# Altium PCB djb_v2_flex_rev.PcbDoc
Units mm, origin at the board's own origin, x right, y up, seen from the top; angles counter-clockwise.
Board outline 12.43 x 7.55 mm, 2 copper layers (Top Layer, Bottom Layer), stack 0.093 mm thick; 3 components, 4 nets, 16 pads, 0 vias.
Unrouted connection lines stored in the file: 1.
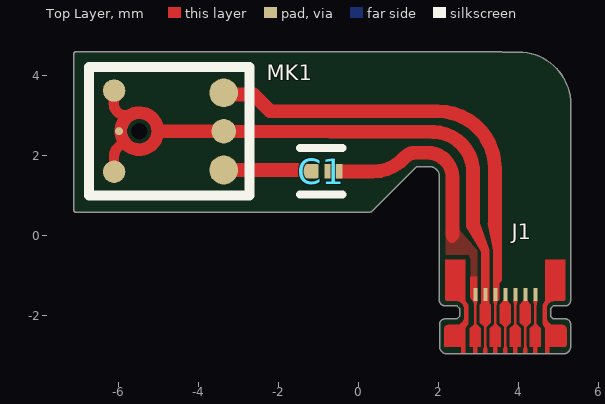
[diagram p0: Top Layer view]
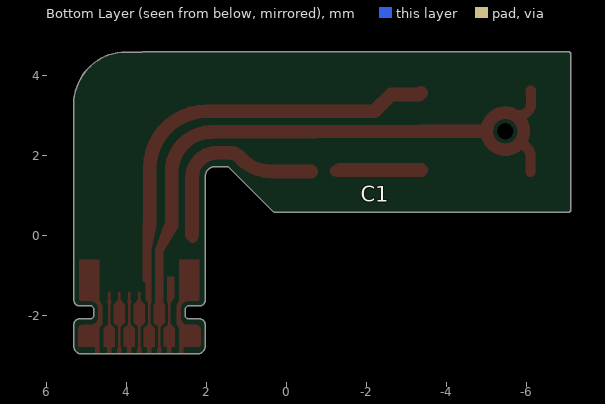
[diagram p1: Bottom Layer view, seen from below]

## Layer stack, top to bottom
Top Coverlay: solder mask 0.0102, Solder Resist, Dk 3.5
Top Coverlay: solder mask 0.012, FC-001, Dk 4
Top Layer: signal copper 0.018
Dielectric 1: dielectric 0.025, FR-4, Dk 4.8
Bottom Layer: signal copper 0.012
Adhesive 1: prepreg 0.013, PP-006, Dk 4.1
Stiffener 1: core 0.025, Core-009, Dk 4.5
Bottom Solder: solder mask 0.012, FC-001, Dk 4
Bottom Solder: solder mask 0.0102, Solder Resist, Dk 3.5

## Board outline
2.037,-2.76 2.037,-2.21 cw(c2.175,-2.21) 2.175,-2.071 2.475,-2.071 2.537,-2.01 2.537,-1.81 2.475,-1.748 2.175,-1.748 cw(c2.175,-1.61) 2.052,-1.674 2.032,-1.64 2.032,1.49 ccw(c1.79,1.49) 1.824,1.729 1.81,1.727 1.451,1.727 0.327,0.603 0.3,0.592 -7.07,0.592 -7.108,0.63 -7.108,4.567 -7.07,4.605 3.59,4.605 3.612,4.598 4.01,4.598 cw(c4.01,3.29) 5.318,3.29 5.318,-0.28 5.313,-0.299 5.313,-1.61 cw(c5.175,-1.61) 5.175,-1.748 4.875,-1.748 4.813,-1.81 4.813,-2.01 4.875,-2.071 5.175,-2.071 cw(c5.175,-2.21) 5.313,-2.21 5.313,-2.76 cw(c5.125,-2.76) 5.125,-2.948 2.225,-2.948 cw(c2.225,-2.76)

## Design rules (kind name [scope] priority, off if disabled: settings)
Clearance Clearance_1 [All] p1: gap=0.01 ignorepadtopadclearanceinfootprint=FALSE except(0: Arc-Hole Track-Hole SMDPad-Hole THPad-Hole Via-Hole Fill-Hole Poly-Hole Region-Hole Text-Hole)
Clearance [All] p2: gap=0.254 ignorepadtopadclearanceinfootprint=FALSE except(0: Arc-Hole Track-Hole SMDPad-Hole THPad-Hole Via-Hole Fill-Hole Poly-Hole Region-Hole Text-Hole)
DiffPairsRouting [All] p1: maxlimit=0.254 minlimit=0.254 mostfreqgap=0.254 substack1={70FC03B5-46E0-49A6-B8D5-33E4079AE70D} toplayer_{70fc03b5-46e0-49a6-b8d5-33e4079ae70d}_minwidth=0.381 toplayer_{70fc03b5-46e0-49a6-b8d5-33e4079ae70d}_maxwidth=0.381 toplayer_{70fc03b5-46e0-49a6-b8d5-33e4079ae70d}_prefwidth=0.381 bottomlayer_{70fc03b5-46e0-49a6-b8d5-33e4079ae70d}_minwidth=0.381 bottomlayer_{70fc03b5-46e0-49a6-b8d5-33e4079ae70d}_maxwidth=0.381 bottomlayer_{70fc03b5-46e0-49a6-b8d5-33e4079ae70d}_prefwidth=0.381 toplayer_minwidth=0.381 toplayer_maxwidth=0.381 toplayer_prefwidth=0.381 bottomlayer_minwidth=0.381 bottomlayer_maxwidth=0.381 bottomlayer_prefwidth=0.381 maxuncoupledlength=12.7
PolygonConnect [All] p1: connectstyle=Relief reliefconductorwidth=0.254 reliefentries=4 polygonreliefangle="90 Angle" airgapwidth=0.254
RoutingVias [All] p1: holewidth=0.711 width=1.27 viastyle="Through Hole" minholewidth=0.711 minwidth=1.27 maxholewidth=0.711 maxwidth=1.27
SolderMaskExpansion [All] p1: expansion=0.102 istentingtop=FALSE
UnpouredPolygon [InNet('No Net')] p1: allowunpoured=TRUE allowshelved=TRUE
Width [All] p1: maxlimit=0.5 minlimit=0.01 preferedwidth=0.254 substack1={70FC03B5-46E0-49A6-B8D5-33E4079AE70D}
28 further rules are at their usual default settings.

## Components (designator, comment, footprint, x,y, rotation, side; value= is the part's Value field where it differs from the comment)
C1 "GRM033R60J155ME14D" FP-GRM033-0_03-IPC_B -0.916,1.62 r0 top
J1 "mic_connect" mic_connect 3.68,-1.46 r0 top
MK1 "AMM-3738-B-R" 665-AMM-3738-B-R -5.47,2.62 r90 top

## Footprints (in the part's own frame and the unit in brackets; to place one, negate y for a bottom-side part, rotate by r counter-clockwise, add the part's x,y. Pads: shape width x height; smd on the part's side, far side on the other; paste and mask are expansions set on the pad)
665-AMM-3738-B-R [mm] "Analog MEMS Microphone"
  round 0.72 smd: 1(-0.97,-2.11) 4(0.96,-2.11)
  round 0.56 smd: 2(-1.015,0.63)
  round 0.56 smd mask+0.102: 3(1.015,0.63)
  round 0.61 smd: 5(0,-2.11)
  round 0.2 smd: 6(0,0.508)
  Top Layer circle w0.315: c0,0 r0.463
  silkscreen extent -1.61,-2.76 1.6,1.26, body extent -1.48,-2.63 1.47,1.13, height 1.11
FP-GRM033-0_03-IPC_B [mm]
  rect 0.454x0.363 smd paste+0 mask+0: 1(-0.304,0) 2(0.304,0)
  silkscreen extent -0.53,-0.58 0.53,0.58, body extent -0.68,-0.33 0.68,0.33, height 0.25
mic_connect [mm] "connection pad for behind ear microphone"
  rect 0.1x0.33 smd paste-1000 mask-1000: 1(0.75,0) 2(0.5,0) 3(0.25,0) 4(0,0) 5(-0.25,0) 6(-0.5,0) 7(-0.75,0)
  Top Layer region: -1,-1.465 -1.1,-1.465 -1.1,-1.315 -1.48,-1.315 -1.499,-1.311 -1.515,-1.3 -1.526,-1.284 -1.53,-1.265 -1.53,-1.265 -1.53,-0.865 -1.522,-0.827 -1.501,-0.794 -1.468,-0.773 -1.43,-0.765 -1.43,-0.765 -1.23,-0.765 -1.153,-0.75 -1.089,-0.706 -1.045,-0.642 -1.03,-0.565 -1.03,-0.565 -1.03,-0.365 -1.045,-0.288 -1.089,-0.224 -1.153,-0.18 -1.23,-0.165 -1.23,-0.165 -1.45,-0.165 -1.469,-0.161 -1.485,-0.15 -1.496,-0.134 -1.5,-0.115 -1.5,-0.115 -1.5,0.865 -1,0.865 -1,-0.165 -0.93,-0.255 -0.93,-0.745 -1,-0.845
  Top Layer region: 1,-1.465 1.1,-1.465 1.1,-1.315 1.48,-1.315 1.499,-1.311 1.515,-1.3 1.526,-1.284 1.53,-1.265 1.53,-1.265 1.53,-0.865 1.522,-0.827 1.501,-0.794 1.468,-0.773 1.43,-0.765 1.43,-0.765 1.23,-0.765 1.153,-0.75 1.089,-0.706 1.045,-0.642 1.03,-0.565 1.03,-0.565 1.03,-0.365 1.045,-0.288 1.089,-0.224 1.153,-0.18 1.23,-0.165 1.23,-0.165 1.45,-0.165 1.469,-0.161 1.485,-0.15 1.496,-0.134 1.5,-0.115 1.5,-0.115 1.5,0.865 1,0.865 1,-0.165 0.93,-0.255 0.93,-0.745 1,-0.845
  Top Layer region: -0.45,-1.465 -0.45,-1.365 -0.47,-1.305 -0.53,-1.305 -0.55,-1.365 -0.55,-1.465
  Top Layer region: 0.05,-1.465 0.05,-1.365 0.03,-1.305 -0.03,-1.305 -0.05,-1.365 -0.05,-1.465
  Top Layer region: 0.55,-1.465 0.55,-1.365 0.53,-1.305 0.47,-1.305 0.45,-1.365 0.45,-1.465
  Top Layer region: 0.8,-0.155 0.8,-0.165 0.78,-0.265 0.72,-0.265 0.7,-0.165 0.7,-0.155
  Top Layer region: -0.7,-0.155 -0.7,-0.165 -0.72,-0.265 -0.78,-0.265 -0.8,-0.165 -0.8,-0.155
  Top Layer region: -0.2,-0.155 -0.2,-0.165 -0.22,-0.265 -0.28,-0.265 -0.3,-0.165 -0.3,-0.155
  Top Layer region: 0.3,-0.155 0.3,-0.165 0.28,-0.265 0.22,-0.265 0.2,-0.165 0.2,-0.155
  Top Layer region: 0.53,-0.815 0.64,-0.715 0.64,-0.265 0.55,-0.165 0.55,-0.145 0.45,-0.145 0.45,-0.165 0.36,-0.265 0.36,-0.715 0.47,-0.815
  Top Layer region: 0.89,-1.315 0.89,-0.845 0.78,-0.745 0.72,-0.745 0.61,-0.845 0.61,-1.315 0.7,-1.315 0.7,-1.465 0.8,-1.465 0.8,-1.315
  Top Layer region: 0.39,-1.315 0.39,-0.845 0.28,-0.745 0.22,-0.745 0.11,-0.845 0.11,-1.315 0.2,-1.315 0.2,-1.465 0.3,-1.465 0.3,-1.315
  Top Layer region: -0.11,-1.315 -0.11,-0.845 -0.22,-0.745 -0.28,-0.745 -0.39,-0.845 -0.39,-1.315 -0.3,-1.315 -0.3,-1.465 -0.2,-1.465 -0.2,-1.315
  Top Layer region: -0.61,-1.315 -0.61,-0.845 -0.72,-0.745 -0.78,-0.745 -0.89,-0.845 -0.89,-1.315 -0.8,-1.315 -0.8,-1.465 -0.7,-1.465 -0.7,-1.315
  Top Layer region: 0.03,-0.815 0.14,-0.715 0.14,-0.265 0.05,-0.165 0.05,-0.145 -0.05,-0.145 -0.05,-0.165 -0.14,-0.265 -0.14,-0.715 -0.03,-0.815
  Top Layer region: -0.47,-0.815 -0.36,-0.715 -0.36,-0.265 -0.45,-0.165 -0.45,-0.145 -0.55,-0.145 -0.55,-0.165 -0.64,-0.265 -0.64,-0.715 -0.53,-0.815
  Top Layer lines w0.07: -0.75,-1.365 -0.75,0 -0.75,0.03 -0.75,0.035 ; -0.5,-1.365 -0.5,0 -0.5,0.035 ; -0.25,-1.365 -0.25,0 -0.25,0.035 ; 0,-1.365 0,0.035 ; 0.25,-1.365 0.25,0 0.25,0.035 ; 0.5,-1.365 0.5,0 0.5,0.035 ; 0.75,-1.365 0.75,0 0.75,0.035
  body extent -1.6,-1.47 1.6,1.16, height 0.02

## Part data
C1: library part CMP-06035-017352-1, "Chip Multilayer Ceramic Capacitors for General Purpose, 0201, 1.5uF, X5R, 15%, 20%, 6.3V", Capacitance=1.5uF, Case Code (Imperial)=0201, Case Code (Metric)=0603, Dielectric=X5R, Max Operating Temperature=85°C, Min Operating Temperature=-55°C, Tolerance=20%, Voltage Rating=6.3V, Case/Package=0201, Length=0.024inch, Mount="Surface Mount", Packaging="Tape and Reel", Thickness=0.013inch, Voltage Rating (DC)=6.3V, Width=0.012inch
MK1: Manufacturer="PUI Audio", Supplier Part Number 1=665-AMM-3738-B-R, Supplier 1=Mouser

## Free pads (board coordinates)
  round 0 hole 0.411 unplated: 2(-5.466,2.623)

## Nets (pads, with @x,y where several pads share a name; then routed paths per layer and width w, separated by ;. In a path a pad name is that pad's centre, name@x,y a point inside that pad or via, vN(x,y) a via of type N, cw(c..) or ccw(c..) an arc to the next point about the centre after c; other vN are vias at no path point)
+MEMS1: J1.5 MK1.4 | length 9.2
  Top Layer w0.345: MK1.4 -3.319,3.539 -2.619,3.539 -2.2,3.12 1.99,3.12 cw(c1.99,1.69) 3.42,1.69 3.42,0.32
GND1: J1.6 MK1.2 MK1.3 MK1.5 MK1.6 | length 11.4
  Top Layer w0.254: MK1.2 -6.1,2 cw(c-5.81,2) -5.81,2.29 ; MK1.3 -6.11,3.635 -6.11,3.31 ccw(c-5.82,3.31) -5.82,3.02 ; -5,2.6 cw(c-4.98,2.6) -4.98,2.62
  Top Layer w0.345: -4.98,2.62 MK1.5 1.883,2.601 cw(c1.869,1.595) 2.868,1.711 cw(c2.525,1.671) 2.87,1.672 2.87,0.32
MIC1: C1.2 J1.7 | length 5
  Top Layer w0.254: 2.344,-0.052 ccw(c2.106,0.037) 2.36,0.034
  Top Layer w0.345: C1.2@-0.62,1.61 0.363,1.61 ccw(c0.365,2.694) 1.17,1.968 cw(c1.425,1.735) 1.423,2.08 1.74,2.08 cw(c1.74,1.46) 2.36,1.46 2.36,0.035
NetC1_1: C1.1 MK1.1 | length 2.2
  Top Layer w0.254: MK1.1 MK1.1@-3.345,1.635 ; C1.1@-1.32,1.65 -1.218,1.641 C1.1@-1.21,1.64 ; C1.1@-1.235,1.635 C1.1
  Top Layer w0.345: MK1.1 C1.1@-1.32,1.65
pads on no net: J1.1 J1.2 J1.3 J1.4

## Polygon pours and split planes (outlines as drawn)
MIC1 on Top Layer "MIC1_L01_P001" (solid, pour order 1): 2.526,0.16 2.195,0.16 2.195,-0.47 2.705,-0.47 cw(c2.705,-0.574) 2.81,-0.575 2.81,-1.03 2.98,-1.03 2.98,-0.357

## Other copper
Top Layer:
  region net +MEMS1: 3.246,0.32 3.59,0.32 3.59,-1.124 3.525,-1.18 3.525,-1.59 3.455,-1.66 cw(c3.399,-1.63) 3.432,-1.685 3.38,-1.642 3.38,-0.352
  region net GND1: 2.715,0.32 3.039,0.32 3.278,-0.349 cw(c3.248,-0.36) 3.28,-0.36 3.28,-0.698 3.28,-1.782 3.18,-1.782 3.15,-1.782 3.08,-1.782 3.08,-1.628 3.08,-1.212 3.08,-0.389 2.715,0.21 cw(c2.808,0.265)
  region net MIC1: 2.98,-1.64 2.89,-1.66 2.806,-1.55 2.806,-1.022 2.98,-1.022

## Silkscreen, mask and mechanical layers (free items; w line width, h text height)
Board Shape:
  lines w0.076: 1.78,1.77 1.79,1.77 cw(c1.79,1.49) 2.07,1.49 2.07,-1.64 ; 1.81,1.765 1.435,1.765 0.3,0.63 -7.07,0.63 -7.07,4.567 3.59,4.567 ; 2.075,-1.61 ccw(c2.175,-1.61) 2.175,-1.71 2.475,-1.71 cw(c2.475,-1.81) 2.575,-1.81 2.575,-2.01 cw(c2.475,-2.01) 2.475,-2.11 2.175,-2.11 ccw(c2.175,-2.21) 2.075,-2.21 2.075,-2.76 ccw(c2.225,-2.76) 2.225,-2.91 5.125,-2.91 ccw(c5.125,-2.76) 5.275,-2.76 5.275,-2.21 ccw(c5.175,-2.21) 5.175,-2.11 4.875,-2.11 cw(c4.875,-2.01) 4.775,-2.01 4.775,-1.81 cw(c4.875,-1.81) 4.875,-1.71 5.175,-1.71 ccw(c5.175,-1.61) 5.275,-1.61 5.275,-0.28 ; 3.56,4.56 4.01,4.56 cw(c4.01,3.29) 5.28,3.29 5.28,2.82 ; 5.28,-0.28 5.28,3.03